# Altium PCB AT89S52单片机入门与提高_粗.PcbDoc (part 3 of 5)
Units mm, origin at the board's own origin, x right, y up, seen from the top; angles counter-clockwise.
Board outline 152.4 x 101.6 mm, 2 copper layers (Top Layer, Bottom Layer); 111 components, 112 nets, 451 pads, 42 vias.
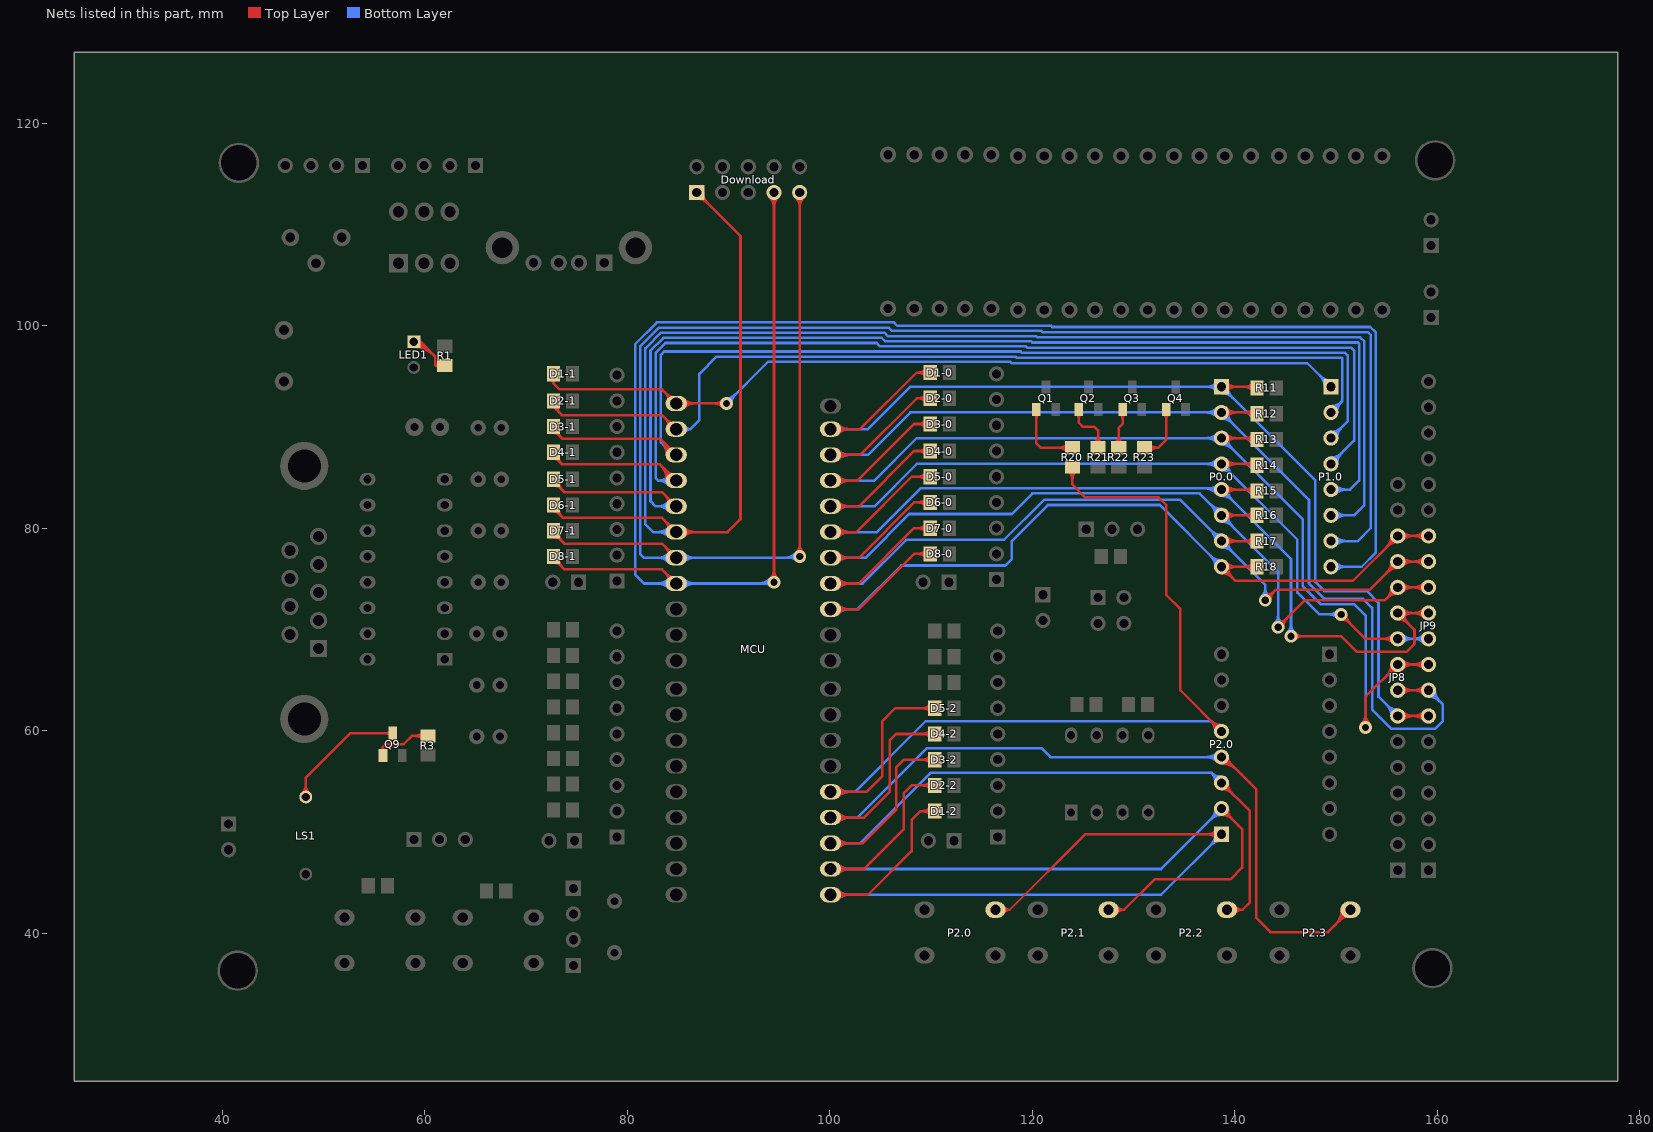
[diagram p3: the nets of this part, all layers, seen from the top]

## Via types
v1: diameter 1.27, hole 0.711, Top Layer to Bottom Layer, 42 vias

## Nets (pads, with @x,y where several pads share a name; then routed paths per layer and width w, separated by ;. In a path a pad name is that pad's centre, name@x,y a point inside that pad or via, vN(x,y) a via of type N, cw(c..) or ccw(c..) an arc to the next point about the centre after c; other vN are vias at no path point) (continued)
NetLED1_1: LED1.1 R1.2 | length 12.2
  Top Layer w0.254: LED1.1@58.928,97.917 cw(c58.928,95.158) 60.879,97.109 ; LED1.1@58.928,98.171 cw(c58.928,96.025) 60.446,97.542 ; LED1.1@58.928,98.679 cw(c58.928,97.759) 59.578,98.41 ; 60.012,97.976 ccw(c58.928,96.892) LED1.1@58.928,98.425 59.563,98.425 61.021,96.967 61.021,96.078 ; R1.2@61.976,96.078 61.021,96.078 ; 61.021,96.078 ccw(c61.021,96.515) 61.41,96.316 cw(c61.021,96.515) 61.021,96.078 ; 61.021,96.078 cw(c61.021,95.641) 61.41,95.84 ccw(c61.021,95.641) 61.021,96.078
NetLS1_1: LS1.1 Q9.3 | length 16.5
  Top Layer w0.254: LS1.1@47.901,53.826 ccw(c47.034,54.693) 48.26,54.693 ccw(c49.486,54.693) LS1.1@48.619,53.826 ; LS1.1@48.26,53.467 48.26,55.372 52.652,59.764 Q9.3@56.835,59.764 ; 56.115,59.764 ccw(c56.115,60.484) 56.624,59.975 cw(c56.115,60.484) 56.115,59.764 ; 56.115,59.764 cw(c56.115,59.045) 56.624,59.553 ccw(c56.115,59.045) 56.115,59.764
NetQ1_1: Q1.1 R20.2 | length 11.3
  Top Layer w0.254: Q1.1@120.401,91.727 120.401,88.387 120.843,87.945 R20.2@123.952,87.945 ; R20.2@123.482,87.575 ccw(c122.589,86.682) 122.589,87.945 ccw(c122.589,89.208) R20.2@123.482,88.315 ; 120.401,90.783 ccw(c119.681,90.783) 120.19,91.291 cw(c119.681,90.783) 120.401,90.783 ; 120.401,90.783 cw(c121.12,90.783) 120.611,91.291 ccw(c121.12,90.783) 120.401,90.783
NetQ2_1: Q2.1 R21.2 | length 9.5
  Top Layer w0.254: Q2.1@124.592,91.727 124.592,90.419 124.968,90.043 126.111,90.043 126.492,89.662 R21.2@126.492,87.945 ; R21.2@126.122,88.315 ccw(c125.229,89.208) 126.492,89.208 ccw(c127.755,89.208) R21.2@126.862,88.315 ; 124.592,90.783 ccw(c123.872,90.783) 124.381,91.291 cw(c123.872,90.783) 124.592,90.783 ; 124.592,90.783 cw(c125.311,90.783) 124.802,91.291 ccw(c125.311,90.783) 124.592,90.783
NetQ3_1: Q3.1 R22.2 | length 8.2
  Top Layer w0.254: R22.2@128.154,88.315 ccw(c127.261,89.208) 128.524,89.208 ccw(c129.787,89.208) R22.2@128.894,88.315 ; R22.2@128.524,87.945 128.524,89.916 128.91,90.302 Q3.1@128.91,91.727 ; 128.91,90.783 ccw(c128.19,90.783) 128.699,91.291 cw(c128.19,90.783) 128.91,90.783 ; 128.91,90.783 cw(c129.629,90.783) 129.12,91.291 ccw(c129.629,90.783) 128.91,90.783
NetQ4_1: Q4.1 R23.2 | length 9.6
  Top Layer w0.254: R23.2@131.064,87.945 132.395,87.945 ; R23.2@131.54,87.582 cw(c132.395,86.758) 132.395,87.945 ; R23.2@131.54,88.308 ccw(c132.395,89.132) 132.395,87.945 ; Q4.1@133.228,91.727 133.228,88.778 132.395,87.945 ; 133.228,90.783 ccw(c132.508,90.783) 133.017,91.291 cw(c132.508,90.783) 133.228,90.783 ; 133.228,90.783 cw(c133.947,90.783) 133.438,91.291 ccw(c133.947,90.783) 133.228,90.783
NetQ9_2: Q9.1 R3.2 | length 9.6
  Top Layer w0.254: Q9.1@55.885,57.564 55.885,58.425 ; R3.2@59.855,59.127 ccw(c58.962,58.234) 58.962,59.497 ccw(c58.962,60.76) R3.2@59.855,59.867 ; R3.2@60.325,59.497 58.735,59.497 57.912,58.674 56.134,58.674 55.885,58.425 ; 55.885,58.425 ccw(c56.414,58.425) 56.075,58.018 cw(c56.414,58.425) 55.885,58.425 ; 55.885,58.425 cw(c55.356,58.425) 55.694,58.018 ccw(c55.356,58.425) 55.885,58.425
P0.0: D1-0.2 JP8.7 JP9.7 MCU.39 P0.0.1 R11.1 | length 151
  Top Layer w0.254: MCU.39@100.072,89.788 102.996,89.788 108.585,95.377 D1-0.2@109.921,95.377 ; MCU.39@100.635,89.525 cw(c101.269,88.891) 101.269,89.788 cw(c101.269,90.685) MCU.39@100.635,90.051 ; MCU.39@100.814,89.346 cw(c101.882,88.278) 101.882,89.788 cw(c101.882,91.298) MCU.39@100.814,90.23 ; D1-0.2@109.551,95.007 ccw(c108.658,94.114) 108.658,95.377 ccw(c108.658,96.64) D1-0.2@109.551,95.747 ; P0.0.1@138.684,93.98 142.052,93.98 R11.1@142.179,93.853 ; P0.0.1@138.945,93.719 cw(c139.575,93.089) 139.575,93.98 cw(c139.575,94.871) P0.0.1@138.945,94.241 ; P0.0.1@139.125,93.539 cw(c140.188,92.476) 140.188,93.98 cw(c140.188,95.484) P0.0.1@139.125,94.421 ; 140.851,93.98 cw(c140.851,92.625) R11.1@141.809,93.583 ; 140.982,93.98 ccw(c140.982,95.15) R11.1@141.809,94.323 ; 141.464,93.98 cw(c141.464,93.238) R11.1@141.989,93.763 ; JP8.7@156.083,61.468 JP9.7@159.131,61.468 ; JP8.7@156.344,61.207 cw(c156.974,60.577) 156.974,61.468 cw(c156.974,62.359) JP8.7@156.344,61.729 ; JP8.7@156.524,61.027 cw(c157.587,59.964) 157.587,61.468 cw(c157.587,62.972) JP8.7@156.524,61.909 ; JP9.7@158.69,61.027 ccw(c157.627,59.964) 157.627,61.468 ccw(c157.627,62.972) JP9.7@158.69,61.909 ; JP9.7@158.87,61.207 ccw(c158.24,60.577) 158.24,61.468 ccw(c158.24,62.359) JP9.7@158.87,61.729
  Bottom Layer w0.254: MCU.39@100.072,89.788 103.758,89.788 107.95,93.98 P0.0.1@138.684,93.98 147.955,84.709 147.955,74.676 148.844,73.787 153.035,73.787 154.178,72.644 154.178,63.373 JP8.7@156.083,61.468 ; 101.269,89.788 ccw(c101.269,88.891) 100.635,89.525 cw(c101.269,88.891) 101.269,89.788 ; 101.269,89.788 cw(c101.269,90.685) 100.635,90.051 ccw(c101.269,90.685) 101.269,89.788 ; 101.882,89.788 ccw(c101.882,88.278) 100.814,89.346 cw(c101.882,88.278) 101.882,89.788 ; 101.882,89.788 cw(c101.882,91.298) 100.814,90.23 ccw(c101.882,91.298) 101.882,89.788 ; 137.18,93.98 ccw(c137.18,95.484) 138.243,94.421 cw(c137.18,95.484) 137.18,93.98 ; 137.18,93.98 cw(c137.18,92.476) 138.243,93.539 ccw(c137.18,92.476) 137.18,93.98 ; 137.793,93.98 ccw(c137.793,94.871) 138.423,94.241 cw(c137.793,94.871) 137.793,93.98 ; 137.793,93.98 cw(c137.793,93.089) 138.423,93.719 ccw(c137.793,93.089) 137.793,93.98 ; P0.0.1@139.314,93.35 ccw(c138.684,92.72) 138.684,93.611 cw(c138.684,92.72) P0.0.1@139.314,93.35 ; P0.0.1@139.314,93.35 cw(c139.944,93.98) 139.053,93.98 ccw(c139.944,93.98) P0.0.1@139.314,93.35 ; 139.748,92.916 ccw(c138.684,91.853) 138.684,93.357 cw(c138.684,91.853) 139.748,92.916 ; 139.748,92.916 cw(c140.811,93.98) 139.307,93.98 ccw(c140.811,93.98) 139.748,92.916 ; 155.019,62.532 ccw(c156.083,63.595) 156.083,62.091 cw(c156.083,63.595) 155.019,62.532 ; 155.019,62.532 cw(c153.956,61.468) 155.46,61.468 ccw(c153.956,61.468) 155.019,62.532 ; 155.453,62.098 ccw(c156.083,62.728) 156.083,61.837 cw(c156.083,62.728) 155.453,62.098 ; 155.453,62.098 cw(c154.823,61.468) 155.714,61.468 ccw(c154.823,61.468) 155.453,62.098
P0.1: D2-0.2 JP8.8 JP9.8 MCU.38 P0.0.2 R12.1 | length 158.3
  Top Layer w0.254: MCU.38@100.072,87.248 102.996,87.248 108.585,92.837 D2-0.2@109.921,92.837 ; MCU.38@100.635,86.985 cw(c101.269,86.351) 101.269,87.248 cw(c101.269,88.145) MCU.38@100.635,87.511 ; MCU.38@100.814,86.806 cw(c101.882,85.738) 101.882,87.248 cw(c101.882,88.758) MCU.38@100.814,87.69 ; D2-0.2@109.551,92.467 ccw(c108.658,91.574) 108.658,92.837 ccw(c108.658,94.1) D2-0.2@109.551,93.207 ; P0.0.2@138.684,91.44 142.052,91.44 R12.1@142.179,91.313 ; P0.0.2@138.945,91.179 cw(c139.575,90.549) 139.575,91.44 cw(c139.575,92.331) P0.0.2@138.945,91.701 ; P0.0.2@139.125,90.999 cw(c140.188,89.936) 140.188,91.44 cw(c140.188,92.944) P0.0.2@139.125,91.881 ; 140.851,91.44 cw(c140.851,90.085) R12.1@141.809,91.043 ; 140.982,91.44 ccw(c140.982,92.61) R12.1@141.809,91.783 ; 141.464,91.44 cw(c141.464,90.698) R12.1@141.989,91.223 ; JP8.8@156.083,64.008 JP9.8@159.131,64.008 ; JP8.8@156.344,63.747 cw(c156.974,63.117) 156.974,64.008 cw(c156.974,64.899) JP8.8@156.344,64.269 ; JP8.8@156.524,63.567 cw(c157.587,62.504) 157.587,64.008 cw(c157.587,65.512) JP8.8@156.524,64.449 ; JP9.8@158.69,63.567 ccw(c157.627,62.504) 157.627,64.008 ccw(c157.627,65.512) JP9.8@158.69,64.449 ; JP9.8@158.87,63.747 ccw(c158.24,63.117) 158.24,64.008 ccw(c158.24,64.899) JP9.8@158.87,64.269
  Bottom Layer w0.254: MCU.38@100.072,87.248 103.758,87.248 107.95,91.44 P0.0.2@138.684,91.44 147.32,82.804 147.32,74.549 148.844,73.025 152.654,73.025 153.543,72.136 153.543,62.103 155.448,60.198 159.766,60.198 160.528,60.96 160.528,62.611 JP9.8@159.131,64.008 ; 101.269,87.248 ccw(c101.269,86.351) 100.635,86.985 cw(c101.269,86.351) 101.269,87.248 ; 101.269,87.248 cw(c101.269,88.145) 100.635,87.511 ccw(c101.269,88.145) 101.269,87.248 ; 101.882,87.248 ccw(c101.882,85.738) 100.814,86.806 cw(c101.882,85.738) 101.882,87.248 ; 101.882,87.248 cw(c101.882,88.758) 100.814,87.69 ccw(c101.882,88.758) 101.882,87.248 ; 137.18,91.44 ccw(c137.18,92.944) 138.243,91.881 cw(c137.18,92.944) 137.18,91.44 ; 137.18,91.44 cw(c137.18,89.936) 138.243,90.999 ccw(c137.18,89.936) 137.18,91.44 ; 137.793,91.44 ccw(c137.793,92.331) 138.423,91.701 cw(c137.793,92.331) 137.793,91.44 ; 137.793,91.44 cw(c137.793,90.549) 138.423,91.179 ccw(c137.793,90.549) 137.793,91.44 ; 139.314,90.81 ccw(c138.684,90.18) 138.684,91.071 cw(c138.684,90.18) 139.314,90.81 ; 139.314,90.81 cw(c139.944,91.44) 139.053,91.44 ccw(c139.944,91.44) 139.314,90.81 ; 139.748,90.376 ccw(c138.684,89.313) 138.684,90.817 cw(c138.684,89.313) 139.748,90.376 ; 139.748,90.376 cw(c140.811,91.44) 139.307,91.44 ccw(c140.811,91.44) 139.748,90.376 ; 159.761,63.378 ccw(c159.131,62.748) 159.131,63.639 cw(c159.131,62.748) 159.761,63.378 ; 159.761,63.378 cw(c160.391,64.008) 159.5,64.008 ccw(c160.391,64.008) 159.761,63.378 ; 160.195,62.944 ccw(c159.131,61.881) 159.131,63.385 cw(c159.131,61.881) 160.195,62.944 ; 160.195,62.944 cw(c161.258,64.008) 159.754,64.008 ccw(c161.258,64.008) 160.195,62.944
P0.2: D3-0.2 JP8.9 JP9.9 MCU.37 P0.0.3 R13.1 | length 154.8
  Top Layer w0.254: MCU.37@100.072,84.708 102.742,84.708 108.331,90.297 D3-0.2@109.921,90.297 ; MCU.37@100.635,84.445 cw(c101.269,83.811) 101.269,84.708 cw(c101.269,85.605) MCU.37@100.635,84.971 ; MCU.37@100.814,84.266 cw(c101.882,83.198) 101.882,84.708 cw(c101.882,86.218) MCU.37@100.814,85.15 ; D3-0.2@109.551,89.927 ccw(c108.658,89.034) 108.658,90.297 ccw(c108.658,91.56) D3-0.2@109.551,90.667 ; P0.0.3@138.684,88.9 142.052,88.9 R13.1@142.179,88.773 ; P0.0.3@138.945,88.639 cw(c139.575,88.009) 139.575,88.9 cw(c139.575,89.791) P0.0.3@138.945,89.161 ; P0.0.3@139.125,88.459 cw(c140.188,87.396) 140.188,88.9 cw(c140.188,90.404) P0.0.3@139.125,89.341 ; 140.851,88.9 cw(c140.851,87.545) R13.1@141.809,88.503 ; 140.982,88.9 ccw(c140.982,90.07) R13.1@141.809,89.243 ; 141.464,88.9 cw(c141.464,88.158) R13.1@141.989,88.683 ; v1@152.549,60.684 ccw(c151.682,61.551) 152.908,61.551 ccw(c154.134,61.551) v1@153.267,60.684 ; v1(152.908,60.325) 152.908,63.373 JP8.9@156.083,66.548 JP9.9@159.131,66.548 ; JP8.9@155.46,66.548 cw(c153.956,66.548) 155.019,65.484 cw(c156.083,64.421) JP8.9@156.083,65.925 ; JP8.9@155.714,66.548 cw(c154.823,66.548) 155.453,65.918 cw(c156.083,65.288) JP8.9@156.083,66.179 ; JP8.9@156.344,66.287 cw(c156.974,65.657) 156.974,66.548 cw(c156.974,67.439) JP8.9@156.344,66.809 ; JP8.9@156.524,66.107 cw(c157.587,65.044) 157.587,66.548 cw(c157.587,68.052) JP8.9@156.524,66.989 ; JP9.9@158.69,66.107 ccw(c157.627,65.044) 157.627,66.548 ccw(c157.627,68.052) JP9.9@158.69,66.989 ; JP9.9@158.87,66.287 ccw(c158.24,65.657) 158.24,66.548 ccw(c158.24,67.439) JP9.9@158.87,66.809
  Bottom Layer w0.254: MCU.37@100.072,84.708 104.393,84.708 108.585,88.9 P0.0.3@138.684,88.9 146.685,80.899 146.685,74.295 148.463,72.517 151.765,72.517 152.908,71.374 v1(152.908,60.325) ; 101.269,84.708 ccw(c101.269,83.811) 100.635,84.445 cw(c101.269,83.811) 101.269,84.708 ; 101.269,84.708 cw(c101.269,85.605) 100.635,84.971 ccw(c101.269,85.605) 101.269,84.708 ; 101.882,84.708 ccw(c101.882,83.198) 100.814,84.266 cw(c101.882,83.198) 101.882,84.708 ; 101.882,84.708 cw(c101.882,86.218) 100.814,85.15 ccw(c101.882,86.218) 101.882,84.708 ; 137.18,88.9 ccw(c137.18,90.404) 138.243,89.341 cw(c137.18,90.404) 137.18,88.9 ; 137.18,88.9 cw(c137.18,87.396) 138.243,88.459 ccw(c137.18,87.396) 137.18,88.9 ; 137.793,88.9 ccw(c137.793,89.791) 138.423,89.161 cw(c137.793,89.791) 137.793,88.9 ; 137.793,88.9 cw(c137.793,88.009) 138.423,88.639 ccw(c137.793,88.009) 137.793,88.9 ; 139.314,88.27 ccw(c138.684,87.64) 138.684,88.531 cw(c138.684,87.64) 139.314,88.27 ; 139.314,88.27 cw(c139.944,88.9) 139.053,88.9 ccw(c139.944,88.9) 139.314,88.27 ; 139.748,87.836 ccw(c138.684,86.773) 138.684,88.277 cw(c138.684,86.773) 139.748,87.836 ; 139.748,87.836 cw(c140.811,88.9) 139.307,88.9 ccw(c140.811,88.9) 139.748,87.836 ; 152.908,61.551 ccw(c154.134,61.551) 153.267,60.684 cw(c154.134,61.551) 152.908,61.551 ; 152.908,61.551 cw(c151.682,61.551) 152.549,60.684 ccw(c151.682,61.551) 152.908,61.551
P0.3: D4-0.2 JP8.10 JP9.10 MCU.36 P0.0.4 R14.1 | length 145.9
  Top Layer w0.254: MCU.36@100.072,82.168 102.869,82.168 108.331,87.63 D4-0.2@109.921,87.63 ; MCU.36@100.635,81.905 cw(c101.269,81.271) 101.269,82.168 cw(c101.269,83.065) MCU.36@100.635,82.431 ; MCU.36@100.814,81.726 cw(c101.882,80.658) 101.882,82.168 cw(c101.882,83.678) MCU.36@100.814,82.61 ; D4-0.2@109.551,87.26 ccw(c108.658,86.367) 108.658,87.63 ccw(c108.658,88.893) D4-0.2@109.551,88 ; P0.0.4@138.684,86.36 142.052,86.36 R14.1@142.179,86.233 ; P0.0.4@138.945,86.099 cw(c139.575,85.469) 139.575,86.36 cw(c139.575,87.251) P0.0.4@138.945,86.621 ; P0.0.4@139.125,85.919 cw(c140.188,84.856) 140.188,86.36 cw(c140.188,87.864) P0.0.4@139.125,86.801 ; 140.851,86.36 cw(c140.851,85.005) R14.1@141.809,85.963 ; 140.982,86.36 ccw(c140.982,87.53) R14.1@141.809,86.703 ; 141.464,86.36 cw(c141.464,85.618) R14.1@141.989,86.143 ; v1@150.495,70.993 cw(c150.495,69.767) 151.362,70.634 cw(c152.229,71.501) v1@151.003,71.501 ; v1(150.495,71.501) 152.908,69.088 JP8.10@156.083,69.088 ; JP8.10@155.642,68.647 ccw(c154.579,67.584) 154.579,69.088 ccw(c154.579,70.592) JP8.10@155.642,69.529 ; JP8.10@155.822,68.827 ccw(c155.192,68.197) 155.192,69.088 ccw(c155.192,69.979) JP8.10@155.822,69.349
  Bottom Layer w0.254: MCU.36@100.072,82.168 104.393,82.168 108.585,86.36 P0.0.4@138.684,86.36 146.177,78.867 146.177,73.66 148.336,71.501 v1(150.495,71.501) ; JP8.10@156.083,69.088 JP9.10@159.131,69.088 ; 101.269,82.168 ccw(c101.269,81.271) 100.635,81.905 cw(c101.269,81.271) 101.269,82.168 ; 101.269,82.168 cw(c101.269,83.065) 100.635,82.431 ccw(c101.269,83.065) 101.269,82.168 ; 101.882,82.168 ccw(c101.882,80.658) 100.814,81.726 cw(c101.882,80.658) 101.882,82.168 ; 101.882,82.168 cw(c101.882,83.678) 100.814,82.61 ccw(c101.882,83.678) 101.882,82.168 ; 137.18,86.36 ccw(c137.18,87.864) 138.243,86.801 cw(c137.18,87.864) 137.18,86.36 ; 137.18,86.36 cw(c137.18,84.856) 138.243,85.919 ccw(c137.18,84.856) 137.18,86.36 ; 137.793,86.36 ccw(c137.793,87.251) 138.423,86.621 cw(c137.793,87.251) 137.793,86.36 ; 137.793,86.36 cw(c137.793,85.469) 138.423,86.099 ccw(c137.793,85.469) 137.793,86.36 ; 139.314,85.73 ccw(c138.684,85.1) 138.684,85.991 cw(c138.684,85.1) 139.314,85.73 ; 139.314,85.73 cw(c139.944,86.36) 139.053,86.36 ccw(c139.944,86.36) 139.314,85.73 ; 139.748,85.296 ccw(c138.684,84.233) 138.684,85.737 cw(c138.684,84.233) 139.748,85.296 ; 139.748,85.296 cw(c140.811,86.36) 139.307,86.36 ccw(c140.811,86.36) 139.748,85.296 ; 149.269,71.501 ccw(c149.269,72.727) 150.136,71.86 cw(c149.269,72.727) 149.269,71.501 ; 149.269,71.501 cw(c149.269,70.275) 150.136,71.142 ccw(c149.269,70.275) 149.269,71.501 ; 156.974,69.088 ccw(c156.974,68.197) 156.344,68.827 cw(c156.974,68.197) 156.974,69.088 ; 156.974,69.088 cw(c156.974,69.979) 156.344,69.349 ccw(c156.974,69.979) 156.974,69.088 ; 157.587,69.088 ccw(c157.587,67.584) 156.524,68.647 cw(c157.587,67.584) 157.587,69.088 ; 157.587,69.088 cw(c157.587,70.592) 156.524,69.529 ccw(c157.587,70.592) 157.587,69.088 ; 157.627,69.088 ccw(c157.627,70.592) 158.69,69.529 cw(c157.627,70.592) 157.627,69.088 ; 157.627,69.088 cw(c157.627,67.584) 158.69,68.647 ccw(c157.627,67.584) 157.627,69.088 ; 158.24,69.088 ccw(c158.24,69.979) 158.87,69.349 cw(c158.24,69.979) 158.24,69.088 ; 158.24,69.088 cw(c158.24,68.197) 158.87,68.827 ccw(c158.24,68.197) 158.24,69.088
P0.4: D5-0.2 JP8.11 JP9.11 MCU.35 P0.0.5 R15.1 | length 144.4
  Top Layer w0.254: MCU.35@100.072,79.628 102.615,79.628 108.077,85.09 D5-0.2@109.921,85.09 ; MCU.35@100.635,79.365 cw(c101.269,78.731) 101.269,79.628 cw(c101.269,80.525) MCU.35@100.635,79.891 ; MCU.35@100.814,79.186 cw(c101.882,78.118) 101.882,79.628 cw(c101.882,81.138) MCU.35@100.814,80.07 ; D5-0.2@109.551,84.72 ccw(c108.658,83.827) 108.658,85.09 ccw(c108.658,86.353) D5-0.2@109.551,85.46 ; P0.0.5@138.684,83.82 142.052,83.82 R15.1@142.179,83.693 ; P0.0.5@138.945,83.559 cw(c139.575,82.929) 139.575,83.82 cw(c139.575,84.711) P0.0.5@138.945,84.081 ; P0.0.5@139.125,83.379 cw(c140.188,82.316) 140.188,83.82 cw(c140.188,85.324) P0.0.5@139.125,84.261 ; 140.851,83.82 cw(c140.851,82.465) R15.1@141.809,83.423 ; 140.982,83.82 ccw(c140.982,84.99) R15.1@141.809,84.163 ; 141.464,83.82 cw(c141.464,83.078) R15.1@141.989,83.603 ; v1(145.542,69.342) 150.495,69.342 152.019,67.818 156.972,67.818 157.734,68.58 157.734,69.977 JP8.11@156.083,71.628 JP9.11@159.131,71.628 ; v1@145.901,68.983 cw(c146.768,68.116) 146.768,69.342 cw(c146.768,70.568) v1@145.901,69.701 ; JP8.11@156.083,71.005 cw(c156.083,69.501) 157.147,70.564 cw(c158.21,71.628) JP8.11@156.706,71.628 ; JP8.11@156.083,71.259 cw(c156.083,70.368) 156.713,70.998 cw(c157.343,71.628) JP8.11@156.452,71.628 ; JP8.11@156.344,71.367 cw(c156.974,70.737) 156.974,71.628 cw(c156.974,72.519) JP8.11@156.344,71.889 ; JP8.11@156.524,71.187 cw(c157.587,70.124) 157.587,71.628 cw(c157.587,73.132) JP8.11@156.524,72.069 ; JP9.11@158.69,71.187 ccw(c157.627,70.124) 157.627,71.628 ccw(c157.627,73.132) JP9.11@158.69,72.069 ; JP9.11@158.87,71.367 ccw(c158.24,70.737) 158.24,71.628 ccw(c158.24,72.519) JP9.11@158.87,71.889
  Bottom Layer w0.254: MCU.35@100.072,79.628 104.647,79.628 108.966,83.947 138.557,83.947 P0.0.5@138.684,83.82 145.542,76.962 v1(145.542,69.342) ; 101.269,79.628 ccw(c101.269,78.731) 100.635,79.365 cw(c101.269,78.731) 101.269,79.628 ; 101.269,79.628 cw(c101.269,80.525) 100.635,79.891 ccw(c101.269,80.525) 101.269,79.628 ; 101.882,79.628 ccw(c101.882,78.118) 100.814,79.186 cw(c101.882,78.118) 101.882,79.628 ; 101.882,79.628 cw(c101.882,81.138) 100.814,80.07 ccw(c101.882,81.138) 101.882,79.628 ; 137.487,83.947 ccw(c137.487,85.017) 138.243,84.261 cw(c137.487,85.017) 137.487,83.947 ; 137.487,83.947 cw(c137.487,82.623) 138.423,83.559 ccw(c137.487,82.623) 137.487,83.947 ; 139.314,83.19 ccw(c138.684,82.56) 138.684,83.451 cw(c138.684,82.56) 139.314,83.19 ; 139.314,83.19 cw(c139.944,83.82) 139.053,83.82 ccw(c139.944,83.82) 139.314,83.19 ; 139.748,82.756 ccw(c138.684,81.693) 138.684,83.197 cw(c138.684,81.693) 139.748,82.756 ; 139.748,82.756 cw(c140.811,83.82) 139.307,83.82 ccw(c140.811,83.82) 139.748,82.756 ; 145.542,70.568 ccw(c146.768,70.568) 145.901,69.701 cw(c146.768,70.568) 145.542,70.568 ; 145.542,70.568 cw(c144.316,70.568) 145.183,69.701 ccw(c144.316,70.568) 145.542,70.568 ; 136.873,83.947 cw(c136.873,82.009) 138.243,83.379 ccw(c136.873,82.009) 136.873,83.947
P0.5: D6-0.2 JP8.12 JP9.12 MCU.34 P0.0.6 R16.1 | length 138.8
  Top Layer w0.254: MCU.34@100.072,77.088 102.869,77.088 108.331,82.55 D6-0.2@109.921,82.55 ; MCU.34@100.635,76.825 cw(c101.269,76.191) 101.269,77.088 cw(c101.269,77.985) MCU.34@100.635,77.351 ; MCU.34@100.814,76.646 cw(c101.882,75.578) 101.882,77.088 cw(c101.882,78.598) MCU.34@100.814,77.53 ; D6-0.2@109.551,82.18 ccw(c108.658,81.287) 108.658,82.55 ccw(c108.658,83.813) D6-0.2@109.551,82.92 ; P0.0.6@138.684,81.28 R16.1@142.179,81.28 ; P0.0.6@138.945,81.019 cw(c139.575,80.389) 139.575,81.28 cw(c139.575,82.171) P0.0.6@138.945,81.541 ; P0.0.6@139.125,80.839 cw(c140.188,79.776) 140.188,81.28 cw(c140.188,82.784) P0.0.6@139.125,81.721 ; R16.1@141.809,80.91 ccw(c140.916,80.017) 140.916,81.28 ccw(c140.916,82.543) R16.1@141.809,81.65 ; v1(144.272,70.231) 146.939,72.898 154.813,72.898 JP8.12@156.083,74.168 JP9.12@159.131,74.168 ; v1@144.272,70.739 ccw(c144.272,71.965) 145.139,71.098 ccw(c146.006,70.231) v1@144.78,70.231 ; JP8.12@155.46,74.168 cw(c153.956,74.168) 155.019,73.104 cw(c156.083,72.041) JP8.12@156.083,73.545 ; JP8.12@155.714,74.168 cw(c154.823,74.168) 155.453,73.538 cw(c156.083,72.908) JP8.12@156.083,73.799 ; JP8.12@156.344,73.907 cw(c156.974,73.277) 156.974,74.168 cw(c156.974,75.059) JP8.12@156.344,74.429 ; JP8.12@156.524,73.727 cw(c157.587,72.664) 157.587,74.168 cw(c157.587,75.672) JP8.12@156.524,74.609 ; JP9.12@158.69,73.727 ccw(c157.627,72.664) 157.627,74.168 ccw(c157.627,75.672) JP9.12@158.69,74.609 ; JP9.12@158.87,73.907 ccw(c158.24,73.277) 158.24,74.168 ccw(c158.24,75.059) JP9.12@158.87,74.429
  Bottom Layer w0.254: MCU.34@100.072,77.088 103.504,77.088 107.823,81.407 117.983,81.407 120.015,83.439 136.525,83.439 P0.0.6@138.684,81.28 144.272,75.692 v1(144.272,70.231) ; 101.269,77.088 ccw(c101.269,76.191) 100.635,76.825 cw(c101.269,76.191) 101.269,77.088 ; 101.269,77.088 cw(c101.269,77.985) 100.635,77.351 ccw(c101.269,77.985) 101.269,77.088 ; 101.882,77.088 ccw(c101.882,75.578) 100.814,76.646 cw(c101.882,75.578) 101.882,77.088 ; 101.882,77.088 cw(c101.882,78.598) 100.814,77.53 ccw(c101.882,78.598) 101.882,77.088 ; 137.62,82.344 ccw(c138.684,83.407) 138.684,81.903 cw(c138.684,83.407) 137.62,82.344 ; 137.62,82.344 cw(c136.557,81.28) 138.061,81.28 ccw(c136.557,81.28) 137.62,82.344 ; 138.054,81.91 ccw(c138.684,82.54) 138.684,81.649 cw(c138.684,82.54) 138.054,81.91 ; 138.054,81.91 cw(c137.424,81.28) 138.315,81.28 ccw(c137.424,81.28) 138.054,81.91 ; 139.314,80.65 ccw(c138.684,80.02) 138.684,80.911 cw(c138.684,80.02) 139.314,80.65 ; 139.314,80.65 cw(c139.944,81.28) 139.053,81.28 ccw(c139.944,81.28) 139.314,80.65 ; 139.748,80.216 ccw(c138.684,79.153) 138.684,80.657 cw(c138.684,79.153) 139.748,80.216 ; 139.748,80.216 cw(c140.811,81.28) 139.307,81.28 ccw(c140.811,81.28) 139.748,80.216 ; 144.272,71.457 ccw(c145.498,71.457) 144.631,70.59 cw(c145.498,71.457) 144.272,71.457 ; 144.272,71.457 cw(c143.046,71.457) 143.913,70.59 ccw(c143.046,71.457) 144.272,71.457
P0.6: D7-0.2 JP8.13 JP9.13 MCU.33 P0.0.7 R17.1 | length 135.8
  Top Layer w0.254: MCU.33@100.072,74.548 102.869,74.548 108.331,80.01 D7-0.2@109.921,80.01 ; MCU.33@100.635,74.285 cw(c101.269,73.651) 101.269,74.548 cw(c101.269,75.445) MCU.33@100.635,74.811 ; MCU.33@100.814,74.106 cw(c101.882,73.038) 101.882,74.548 cw(c101.882,76.058) MCU.33@100.814,74.99 ; D7-0.2@109.551,79.64 ccw(c108.658,78.747) 108.658,80.01 ccw(c108.658,81.273) D7-0.2@109.551,80.38 ; P0.0.7@138.684,78.74 R17.1@142.179,78.74 ; P0.0.7@138.945,78.479 cw(c139.575,77.849) 139.575,78.74 cw(c139.575,79.631) P0.0.7@138.945,79.001 ; P0.0.7@139.125,78.299 cw(c140.188,77.236) 140.188,78.74 cw(c140.188,80.244) P0.0.7@139.125,79.181 ; R17.1@141.809,78.37 ccw(c140.916,77.477) 140.916,78.74 ccw(c140.916,80.003) R17.1@141.809,79.11 ; v1(143.002,72.898) 144.018,73.914 153.289,73.914 JP8.13@156.083,76.708 JP9.13@159.131,76.708 ; v1@143.002,73.406 ccw(c143.002,74.632) 143.869,73.765 ccw(c144.736,72.898) v1@143.51,72.898 ; JP8.13@155.46,76.708 cw(c153.956,76.708) 155.019,75.644 cw(c156.083,74.581) JP8.13@156.083,76.085 ; JP8.13@155.714,76.708 cw(c154.823,76.708) 155.453,76.078 cw(c156.083,75.448) JP8.13@156.083,76.339 ; JP8.13@156.344,76.447 cw(c156.974,75.817) 156.974,76.708 cw(c156.974,77.599) JP8.13@156.344,76.969 ; JP8.13@156.524,76.267 cw(c157.587,75.204) 157.587,76.708 cw(c157.587,78.212) JP8.13@156.524,77.149 ; JP9.13@158.69,76.267 ccw(c157.627,75.204) 157.627,76.708 ccw(c157.627,78.212) JP9.13@158.69,77.149 ; JP9.13@158.87,76.447 ccw(c158.24,75.817) 158.24,76.708 ccw(c158.24,77.599) JP9.13@158.87,76.969
  Bottom Layer w0.254: MCU.33@100.072,74.548 103.25,74.548 107.569,78.867 117.221,78.867 121.158,82.804 134.62,82.804 P0.0.7@138.684,78.74 143.002,74.422 v1(143.002,72.898) ; 101.269,74.548 ccw(c101.269,73.651) 100.635,74.285 cw(c101.269,73.651) 101.269,74.548 ; 101.269,74.548 cw(c101.269,75.445) 100.635,74.811 ccw(c101.269,75.445) 101.269,74.548 ; 101.882,74.548 ccw(c101.882,73.038) 100.814,74.106 cw(c101.882,73.038) 101.882,74.548 ; 101.882,74.548 cw(c101.882,76.058) 100.814,74.99 ccw(c101.882,76.058) 101.882,74.548 ; 137.62,79.804 ccw(c138.684,80.867) 138.684,79.363 cw(c138.684,80.867) 137.62,79.804 ; 137.62,79.804 cw(c136.557,78.74) 138.061,78.74 ccw(c136.557,78.74) 137.62,79.804 ; 138.054,79.37 ccw(c138.684,80) 138.684,79.109 cw(c138.684,80) 138.054,79.37 ; 138.054,79.37 cw(c137.424,78.74) 138.315,78.74 ccw(c137.424,78.74) 138.054,79.37 ; 139.314,78.11 ccw(c138.684,77.48) 138.684,78.371 cw(c138.684,77.48) 139.314,78.11 ; 139.314,78.11 cw(c139.944,78.74) 139.053,78.74 ccw(c139.944,78.74) 139.314,78.11 ; 139.748,77.676 ccw(c138.684,76.613) 138.684,78.117 cw(c138.684,76.613) 139.748,77.676 ; 139.748,77.676 cw(c140.811,78.74) 139.307,78.74 ccw(c140.811,78.74) 139.748,77.676 ; 143.002,74.124 ccw(c144.228,74.124) 143.361,73.257 cw(c144.228,74.124) 143.002,74.124 ; 143.002,74.124 cw(c141.776,74.124) 142.643,73.257 ccw(c141.776,74.124) 143.002,74.124
P0.7: D8-0.2 JP8.14 JP9.14 MCU.32 P0.0.8 R18.1 | length 126.6
  Top Layer w0.254: MCU.32@100.072,72.008 102.869,72.008 108.331,77.47 D8-0.2@109.921,77.47 ; MCU.32@100.635,71.745 cw(c101.269,71.111) 101.269,72.008 cw(c101.269,72.905) MCU.32@100.635,72.271 ; MCU.32@100.814,71.566 cw(c101.882,70.498) 101.882,72.008 cw(c101.882,73.518) MCU.32@100.814,72.45 ; D8-0.2@109.551,77.1 ccw(c108.658,76.207) 108.658,77.47 ccw(c108.658,78.733) D8-0.2@109.551,77.84 ; P0.0.8@138.684,75.577 cw(c138.684,74.073) 139.748,75.136 cw(c140.811,76.2) P0.0.8@139.307,76.2 ; P0.0.8@138.684,75.831 cw(c138.684,74.94) 139.314,75.57 cw(c139.944,76.2) P0.0.8@139.053,76.2 ; P0.0.8@138.945,75.939 cw(c139.575,75.309) 139.575,76.2 cw(c139.575,77.091) P0.0.8@138.945,76.461 ; P0.0.8@139.125,75.759 cw(c140.188,74.696) 140.188,76.2 cw(c140.188,77.704) P0.0.8@139.125,76.641 ; R18.1@141.809,75.83 ccw(c140.916,74.937) 140.916,76.2 ccw(c140.916,77.463) R18.1@141.809,76.57 ; R18.1@142.179,76.2 P0.0.8@138.684,76.2 140.081,74.803 151.638,74.803 JP8.14@156.083,79.248 JP9.14@159.131,79.248 ; JP8.14@155.46,79.248 cw(c153.956,79.248) 155.019,78.184 cw(c156.083,77.121) JP8.14@156.083,78.625 ; JP8.14@155.714,79.248 cw(c154.823,79.248) 155.453,78.618 cw(c156.083,77.988) JP8.14@156.083,78.879 ; JP8.14@156.344,78.987 cw(c156.974,78.357) 156.974,79.248 cw(c156.974,80.139) JP8.14@156.344,79.509 ; JP8.14@156.524,78.807 cw(c157.587,77.744) 157.587,79.248 cw(c157.587,80.752) JP8.14@156.524,79.689 ; JP9.14@158.69,78.807 ccw(c157.627,77.744) 157.627,79.248 ccw(c157.627,80.752) JP9.14@158.69,79.689 ; JP9.14@158.87,78.987 ccw(c158.24,78.357) 158.24,79.248 ccw(c158.24,80.139) JP9.14@158.87,79.509
  Bottom Layer w0.254: MCU.32@100.072,72.008 102.742,72.008 107.061,76.327 117.348,76.327 117.983,76.962 117.983,78.74 121.539,82.296 132.588,82.296 P0.0.8@138.684,76.2 ; 101.269,72.008 ccw(c101.269,71.111) 100.635,71.745 cw(c101.269,71.111) 101.269,72.008 ; 101.269,72.008 cw(c101.269,72.905) 100.635,72.271 ccw(c101.269,72.905) 101.269,72.008 ; 101.882,72.008 ccw(c101.882,70.498) 100.814,71.566 cw(c101.882,70.498) 101.882,72.008 ; 101.882,72.008 cw(c101.882,73.518) 100.814,72.45 ccw(c101.882,73.518) 101.882,72.008 ; 137.62,77.264 ccw(c138.684,78.327) 138.684,76.823 cw(c138.684,78.327) 137.62,77.264 ; 137.62,77.264 cw(c136.557,76.2) 138.061,76.2 ccw(c136.557,76.2) 137.62,77.264 ; 138.054,76.83 ccw(c138.684,77.46) 138.684,76.569 cw(c138.684,77.46) 138.054,76.83 ; 138.054,76.83 cw(c137.424,76.2) 138.315,76.2 ccw(c137.424,76.2) 138.054,76.83
P1.0: D1-1.2 MCU.1 P1.0.1 | length 102.8
  Top Layer w0.254: D1-1.2@72.71,95.25 72.71,94.3 ; 83.717,93.444 cw(c82.643,92.37) MCU.1@84.161,92.336 ; 83.977,93.183 ccw(c84.532,93.739) MCU.1@84.532,92.953 ; 84.137,93.023 cw(c83.465,92.352) MCU.1@84.415,92.331 ; MCU.1@85.395,92.065 cw(c86.029,91.431) 86.029,92.328 cw(c86.029,93.225) MCU.1@85.395,92.591 ; MCU.1@85.574,91.886 cw(c86.642,90.818) 86.642,92.328 cw(c86.642,93.838) MCU.1@85.574,92.77 ; v1@89.43,91.969 ccw(c88.563,91.102) 88.563,92.328 ccw(c88.563,93.554) v1@89.43,92.687 ; v1(89.789,92.328) MCU.1@84.832,92.328 83.446,93.714 73.296,93.714 72.71,94.3 ; 72.71,94.3 ccw(c72.281,94.3) 72.474,94.683 cw(c72.281,94.3) 72.71,94.3 ; 72.71,94.3 cw(c73.139,94.3) 72.946,94.683 ccw(c73.139,94.3) 72.71,94.3
  Bottom Layer w0.254: v1(89.789,92.328) 93.904,96.443 117.827,96.443 117.954,96.316 147.143,96.316 P1.0.1@149.479,93.98 ; 90.656,93.195 ccw(c91.523,92.328) 90.297,92.328 cw(c91.523,92.328) 90.656,93.195 ; 90.656,93.195 cw(c89.789,94.062) 89.789,92.836 ccw(c89.789,94.062) 90.656,93.195 ; 148.415,95.044 ccw(c149.479,96.107) 149.479,94.603 cw(c149.479,96.107) 148.415,95.044 ; 148.415,95.044 cw(c147.352,93.98) 148.856,93.98 ccw(c147.352,93.98) 148.415,95.044 ; P1.0.1@148.849,94.61 ccw(c149.479,95.24) 149.479,94.349 cw(c149.479,95.24) P1.0.1@148.849,94.61 ; P1.0.1@148.849,94.61 cw(c148.219,93.98) 149.11,93.98 ccw(c148.219,93.98) P1.0.1@148.849,94.61
P1.1: D2-1.2 MCU.2 P1.0.2 | length 107.1
  Top Layer w0.254: D2-1.2@72.71,92.583 72.71,92.009 73.545,91.174 83.446,91.174 MCU.2@84.832,89.788 ; 83.717,90.904 cw(c82.643,89.83) MCU.2@84.161,89.796 ; 83.977,90.643 ccw(c84.532,91.199) MCU.2@84.532,90.413 ; 84.137,90.483 cw(c83.465,89.812) MCU.2@84.415,89.791 ; D2-1.2@72.95,92.361 ccw(c73.489,92.086) 73.061,91.658 cw(c73.489,92.086) D2-1.2@72.95,92.361 ; D2-1.2@73.176,92.245 ccw(c73.816,91.919) 73.308,91.411 cw(c73.816,91.919) D2-1.2@73.176,92.245
  Bottom Layer w0.254: MCU.2@84.832,89.788 86.232,89.788 ; P1.0.2@149.479,91.44 150.622,92.583 150.622,96.774 150.572,96.824 118.462,96.824 118.335,96.951 88.823,96.951 87.122,95.25 87.122,90.678 86.232,89.788 ; 86.232,89.788 ccw(c86.232,89.134) 85.67,89.468 cw(c86.232,89.134) 86.232,89.788 ; 86.232,89.788 cw(c86.232,90.442) 85.67,90.108 ccw(c86.232,90.442) 86.232,89.788 ; 150.109,92.07 ccw(c150.739,91.44) 149.848,91.44 cw(c150.739,91.44) 150.109,92.07 ; 150.109,92.07 cw(c149.479,92.7) 149.479,91.809 ccw(c149.479,92.7) 150.109,92.07 ; 150.543,92.504 ccw(c151.606,91.44) 150.102,91.44 cw(c151.606,91.44) 150.543,92.504 ; 150.543,92.504 cw(c149.479,93.567) 149.479,92.063 ccw(c149.479,93.567) 150.543,92.504
P1.2: D3-1.2 MCU.3 P1.0.3 | length 122.8
  Top Layer w0.254: D3-1.2@72.71,89.42 cw(c72.71,88.688) 73.227,89.206 ; D3-1.2@72.71,90.043 72.71,89.723 73.579,88.854 83.226,88.854 MCU.3@84.832,87.248 ; D3-1.2@72.972,89.883 ccw(c73.596,89.742) 73.144,89.289 ; D3-1.2@73.22,89.827 ccw(c74.126,89.621) 73.469,88.964 ; 83.252,88.828 cw(c81.673,87.248) MCU.3@83.907,87.248 ; 83.686,88.394 cw(c82.54,87.248) MCU.3@84.161,87.248 ; 83.977,88.103 ccw(c84.532,88.659) MCU.3@84.532,87.873 ; 84.12,87.961 cw(c83.407,87.248) MCU.3@84.415,87.248
  Bottom Layer w0.254: MCU.3@84.832,87.248 84.583,87.248 83.312,88.519 83.312,97.119 83.652,97.459 118.843,97.459 118.97,97.332 150.876,97.332 151.13,97.078 151.13,90.551 P1.0.3@149.479,88.9 ; 150.109,89.53 ccw(c150.739,88.9) 149.848,88.9 cw(c150.739,88.9) 150.109,89.53 ; 150.109,89.53 cw(c149.479,90.16) 149.479,89.269 ccw(c149.479,90.16) 150.109,89.53 ; 150.543,89.964 ccw(c151.606,88.9) 150.102,88.9 cw(c151.606,88.9) 150.543,89.964 ; 150.543,89.964 cw(c149.479,91.027) 149.479,89.523 ccw(c149.479,91.027) 150.543,89.964 ; 83.429,88.402 cw(c82.274,87.248) 83.907,87.248 ccw(c82.274,87.248) 83.429,88.402 ; 83.551,88.28 ccw(c84.532,89.261) 84.532,87.873 cw(c84.532,89.261) 83.551,88.28 ; 83.862,87.969 cw(c83.141,87.248) 84.161,87.248 ccw(c83.141,87.248) 83.862,87.969 ; 83.985,87.846 ccw(c84.532,88.393) 84.532,87.619 cw(c84.532,88.393) 83.985,87.846
P1.3: D4-1.2 MCU.4 P1.0.4 | length 131.2
  Top Layer w0.254: D4-1.2@72.71,86.88 cw(c72.71,86.148) 73.227,86.666 ; D4-1.2@72.71,87.503 72.71,87.183 73.579,86.314 83.226,86.314 MCU.4@84.832,84.708 ; D4-1.2@72.972,87.343 ccw(c73.596,87.202) 73.144,86.749 ; D4-1.2@73.22,87.287 ccw(c74.126,87.081) 73.469,86.424 ; 83.252,86.288 cw(c81.673,84.708) MCU.4@83.907,84.708 ; 83.686,85.854 cw(c82.54,84.708) MCU.4@84.161,84.708 ; 83.977,85.563 ccw(c84.532,86.119) MCU.4@84.532,85.333 ; 84.12,85.421 cw(c83.407,84.708) MCU.4@84.415,84.708
  Bottom Layer w0.254: MCU.4@84.832,84.708 83.059,84.708 ; P1.0.4@149.479,86.36 151.765,88.646 151.765,97.536 151.461,97.84 119.493,97.84 119.366,97.967 104.954,97.967 104.623,98.298 83.773,98.298 82.804,97.329 82.804,84.963 83.059,84.708 ; 83.059,84.708 ccw(c83.059,86.13) 84.082,85.142 cw(c83.059,86.13) 83.059,84.708 ; 83.059,84.708 cw(c83.059,83.286) 84.082,84.274 ccw(c83.059,83.286) 83.059,84.708 ; 83.657,84.708 ccw(c83.657,85.553) 84.265,84.966 cw(c83.657,85.553) 83.657,84.708 ; 83.657,84.708 cw(c83.657,83.863) 84.265,84.45 ccw(c83.657,83.863) 83.657,84.708 ; 150.109,86.99 ccw(c150.739,86.36) 149.848,86.36 cw(c150.739,86.36) 150.109,86.99 ; 150.109,86.99 cw(c149.479,87.62) 149.479,86.729 ccw(c149.479,87.62) 150.109,86.99 ; 150.543,87.424 ccw(c151.606,86.36) 150.102,86.36 cw(c151.606,86.36) 150.543,87.424 ; 150.543,87.424 cw(c149.479,88.487) 149.479,86.983 ccw(c149.479,88.487) 150.543,87.424
P1.4: D5-1.2 MCU.5 P1.0.5 | length 138.7
  Top Layer w0.254: D5-1.2@72.71,84.213 cw(c72.71,83.175) 73.444,83.909 ; D5-1.2@72.71,84.836 72.71,84.643 73.787,83.566 83.434,83.566 MCU.5@84.832,82.168 ; D5-1.2@72.979,84.736 ccw(c73.853,84.736) D5-1.2@73.235,84.118 ; D5-1.2@73.233,84.736 ccw(c74.72,84.736) 73.669,83.684 ; 83.708,83.292 cw(c82.615,82.199) MCU.5@84.161,82.174 ; 83.977,83.023 ccw(c84.532,83.579) MCU.5@84.532,82.793 ; 84.132,82.868 cw(c83.45,82.185) MCU.5@84.415,82.17
  Bottom Layer w0.254: MCU.5@84.832,82.168 82.805,82.168 82.296,82.677 82.296,97.54 83.562,98.806 105.131,98.806 105.462,98.475 119.874,98.475 120.001,98.348 152.14,98.348 152.273,98.215 152.273,84.709 151.384,83.82 P1.0.5@149.479,83.82 ; 83.022,82.168 ccw(c83.022,83.678) 84.09,82.61 cw(c83.022,83.678) 83.022,82.168 ; 83.022,82.168 cw(c83.022,80.658) 84.09,81.726 ccw(c83.022,80.658) 83.022,82.168 ; 83.636,82.168 ccw(c83.636,83.065) 84.27,82.431 cw(c83.636,83.065) 83.636,82.168 ; 83.636,82.168 cw(c83.636,81.271) 84.27,81.905 ccw(c83.636,81.271) 83.636,82.168 ; 150.37,83.82 ccw(c150.37,82.929) 149.74,83.559 cw(c150.37,82.929) 150.37,83.82 ; 150.37,83.82 cw(c150.37,84.711) 149.74,84.081 ccw(c150.37,84.711) 150.37,83.82 ; 150.983,83.82 ccw(c150.983,82.316) 149.92,83.379 cw(c150.983,82.316) 150.983,83.82 ; 150.983,83.82 cw(c150.983,85.324) 149.92,84.261 ccw(c150.983,85.324) 150.983,83.82
P1.5: D6-1.2 Download.1 MCU.6 P1.0.6 | length 194.5
  Top Layer w0.254: D6-1.2@72.71,81.673 cw(c72.71,80.941) 73.227,81.459 ; D6-1.2@72.71,82.296 72.71,81.976 73.66,81.026 83.434,81.026 MCU.6@84.832,79.628 89.915,79.628 91.186,80.899 91.186,108.839 Download.1@86.868,113.157 ; D6-1.2@72.976,82.156 ccw(c73.743,82.04) 73.194,81.492 ; D6-1.2@73.227,82.118 ccw(c74.36,81.947) 73.55,81.136 ; 83.708,80.752 cw(c82.615,79.659) MCU.6@84.161,79.634 ; 83.977,80.483 ccw(c84.532,81.039) MCU.6@84.532,80.253 ; 84.132,80.328 cw(c83.45,79.645) MCU.6@84.415,79.63 ; MCU.6@85.395,79.365 cw(c86.029,78.731) 86.029,79.628 cw(c86.029,80.525) MCU.6@85.395,79.891 ; MCU.6@85.574,79.186 cw(c86.642,78.118) 86.642,79.628 cw(c86.642,81.138) MCU.6@85.574,80.07 ; Download.1@86.868,112.534 cw(c86.868,111.03) 87.932,112.093 cw(c88.995,113.157) Download.1@87.491,113.157 ; Download.1@86.868,112.788 cw(c86.868,111.897) 87.498,112.527 cw(c88.128,113.157) Download.1@87.237,113.157
  Bottom Layer w0.254: MCU.6@84.832,79.628 82.551,79.628 81.788,80.391 81.788,97.75 83.352,99.314 105.385,99.314 105.716,98.983 120.382,98.983 120.509,98.856 152.35,98.856 152.781,98.425 152.781,82.296 151.765,81.28 P1.0.6@149.479,81.28 ; 83.022,79.628 ccw(c83.022,81.138) 84.09,80.07 cw(c83.022,81.138) 83.022,79.628 ; 83.022,79.628 cw(c83.022,78.118) 84.09,79.186 ccw(c83.022,78.118) 83.022,79.628 ; 83.636,79.628 ccw(c83.636,80.525) 84.27,79.891 cw(c83.636,80.525) 83.636,79.628 ; 83.636,79.628 cw(c83.636,78.731) 84.27,79.365 ccw(c83.636,78.731) 83.636,79.628 ; 150.37,81.28 ccw(c150.37,80.389) 149.74,81.019 cw(c150.37,80.389) 150.37,81.28 ; 150.37,81.28 cw(c150.37,82.171) 149.74,81.541 ccw(c150.37,82.171) 150.37,81.28 ; 150.983,81.28 ccw(c150.983,79.776) 149.92,80.839 cw(c150.983,79.776) 150.983,81.28 ; 150.983,81.28 cw(c150.983,82.784) 149.92,81.721 ccw(c150.983,82.784) 150.983,81.28
P1.6: D7-1.2 Download.9 MCU.7 P1.0.7 | length 221.6
  Top Layer w0.254: D7-1.2@72.71,79.133 cw(c72.71,78.095) 73.444,78.829 ; D7-1.2@72.71,79.756 72.71,79.563 73.787,78.486 83.434,78.486 MCU.7@84.832,77.088 ; D7-1.2@72.979,79.656 ccw(c73.853,79.656) D7-1.2@73.235,79.038 ; D7-1.2@73.233,79.656 ccw(c74.72,79.656) 73.669,78.604 ; 83.708,78.212 cw(c82.615,77.119) MCU.7@84.161,77.094 ; 83.977,77.943 ccw(c84.532,78.499) MCU.7@84.532,77.713 ; 84.132,77.788 cw(c83.45,77.105) MCU.7@84.415,77.09 ; Download.9@96.587,112.716 cw(c95.524,111.653) 97.028,111.653 cw(c98.532,111.653) Download.9@97.469,112.716 ; v1@96.669,77.575 ccw(c95.802,78.442) 97.028,78.442 ccw(c98.254,78.442) v1@97.387,77.575 ; Download.9@96.767,112.896 cw(c96.137,112.266) 97.028,112.266 cw(c97.919,112.266) Download.9@97.289,112.896 ; v1(97.028,77.216) Download.9@97.028,113.157
  Bottom Layer w0.254: v1(97.028,77.216) 96.9,77.088 MCU.7@84.832,77.088 81.66,77.088 81.28,77.468 81.28,97.961 83.141,99.822 105.816,99.822 106.147,99.491 120.89,99.491 121.017,99.364 153.156,99.364 153.416,99.104 153.416,80.01 152.146,78.74 P1.0.7@149.479,78.74 ; 83.022,77.088 ccw(c83.022,78.598) 84.09,77.53 cw(c83.022,78.598) 83.022,77.088 ; 83.022,77.088 cw(c83.022,75.578) 84.09,76.646 ccw(c83.022,75.578) 83.022,77.088 ; 83.636,77.088 ccw(c83.636,77.985) 84.27,77.351 cw(c83.636,77.985) 83.636,77.088 ; 83.636,77.088 cw(c83.636,76.191) 84.27,76.825 ccw(c83.636,76.191) 83.636,77.088 ; 86.029,77.088 ccw(c86.029,76.191) 85.395,76.825 cw(c86.029,76.191) 86.029,77.088 ; 86.029,77.088 cw(c86.029,77.985) 85.395,77.351 ccw(c86.029,77.985) 86.029,77.088 ; 86.642,77.088 ccw(c86.642,75.578) 85.574,76.646 cw(c86.642,75.578) 86.642,77.088 ; 86.642,77.088 cw(c86.642,78.598) 85.574,77.53 ccw(c86.642,78.598) 86.642,77.088 ; 150.37,78.74 ccw(c150.37,77.849) 149.74,78.479 cw(c150.37,77.849) 150.37,78.74 ; 150.37,78.74 cw(c150.37,79.631) 149.74,79.001 ccw(c150.37,79.631) 150.37,78.74 ; 150.983,78.74 ccw(c150.983,77.236) 149.92,78.299 cw(c150.983,77.236) 150.983,78.74 ; 150.983,78.74 cw(c150.983,80.244) 149.92,79.181 ccw(c150.983,80.244) 150.983,78.74 ; 95.493,77.088 ccw(c95.493,78.751) 96.669,77.575 cw(c95.493,78.751) 95.493,77.088 ; 96.106,77.088 ccw(c96.106,78.138) 96.848,77.396 cw(c96.106,78.138) 96.106,77.088 ; 96.111,77.088 cw(c96.111,76.299) 96.669,76.857 ccw(c96.111,76.299) 96.111,77.088
P1.7: D8-1.2 Download.7 MCU.8 P1.0.8 | length 229
  Top Layer w0.254: D8-1.2@72.71,76.593 cw(c72.71,75.555) 73.444,76.289 ; D8-1.2@72.71,77.216 72.71,77.023 73.787,75.946 83.434,75.946 MCU.8@84.832,74.548 ; D8-1.2@72.979,77.116 ccw(c73.853,77.116) D8-1.2@73.235,76.498 ; D8-1.2@73.233,77.116 ccw(c74.72,77.116) 73.669,76.064 ; 83.708,75.672 cw(c82.615,74.579) MCU.8@84.161,74.554 ; 83.977,75.403 ccw(c84.532,75.959) MCU.8@84.532,75.173 ; 84.132,75.248 cw(c83.45,74.565) MCU.8@84.415,74.55 ; Download.7@94.047,112.716 cw(c92.984,111.653) 94.488,111.653 cw(c95.992,111.653) Download.7@94.929,112.716 ; v1@94.129,75.035 ccw(c93.262,75.902) 94.488,75.902 ccw(c95.714,75.902) v1@94.847,75.035 ; Download.7@94.227,112.896 cw(c93.597,112.266) 94.488,112.266 cw(c95.379,112.266) Download.7@94.749,112.896 ; v1(94.488,74.676) Download.7@94.488,113.157
  Bottom Layer w0.254: v1(94.488,74.676) 94.36,74.548 MCU.8@84.832,74.548 81.662,74.548 80.772,75.438 80.772,98.171 82.931,100.33 106.324,100.33 106.655,99.999 121.855,99.999 121.982,99.872 153.366,99.872 153.924,99.314 153.924,77.597 152.527,76.2 P1.0.8@149.479,76.2 ; 83.022,74.548 ccw(c83.022,76.058) 84.09,74.99 cw(c83.022,76.058) 83.022,74.548 ; 83.022,74.548 cw(c83.022,73.038) 84.09,74.106 ccw(c83.022,73.038) 83.022,74.548 ; 83.636,74.548 ccw(c83.636,75.445) 84.27,74.811 cw(c83.636,75.445) 83.636,74.548 ; 83.636,74.548 cw(c83.636,73.651) 84.27,74.285 ccw(c83.636,73.651) 83.636,74.548 ; 86.029,74.548 ccw(c86.029,73.651) 85.395,74.285 cw(c86.029,73.651) 86.029,74.548 ; 86.029,74.548 cw(c86.029,75.445) 85.395,74.811 ccw(c86.029,75.445) 86.029,74.548 ; 86.642,74.548 ccw(c86.642,73.038) 85.574,74.106 cw(c86.642,73.038) 86.642,74.548 ; 86.642,74.548 cw(c86.642,76.058) 85.574,74.99 ccw(c86.642,76.058) 86.642,74.548 ; 150.37,76.2 ccw(c150.37,75.309) 149.74,75.939 cw(c150.37,75.309) 150.37,76.2 ; 150.37,76.2 cw(c150.37,77.091) 149.74,76.461 ccw(c150.37,77.091) 150.37,76.2 ; 150.983,76.2 ccw(c150.983,74.696) 149.92,75.759 cw(c150.983,74.696) 150.983,76.2 ; 150.983,76.2 cw(c150.983,77.704) 149.92,76.641 ccw(c150.983,77.704) 150.983,76.2 ; 92.953,74.548 ccw(c92.953,76.211) 94.129,75.035 cw(c92.953,76.211) 92.953,74.548 ; 93.566,74.548 ccw(c93.566,75.598) 94.308,74.856 cw(c93.566,75.598) 93.566,74.548 ; 93.571,74.548 cw(c93.571,73.759) 94.129,74.317 ccw(c93.571,73.759) 93.571,74.548
P2.0: D1-2.2 MCU.21 P2.0.1@138.684,49.784 P2.0.2@116.355,42.331 | length 108.1
  Top Layer w0.254: MCU.21@100.076,43.815 103.759,43.815 108.077,48.133 108.077,51.181 108.966,52.07 D1-2.2@110.368,52.07 ; MCU.21@100.639,43.552 cw(c101.273,42.918) 101.273,43.815 cw(c101.273,44.712) MCU.21@100.639,44.078 ; MCU.21@100.818,43.373 cw(c101.886,42.305) 101.886,43.815 cw(c101.886,45.325) MCU.21@100.818,44.257 ; D1-2.2@109.998,51.7 ccw(c109.105,50.807) 109.105,52.07 ccw(c109.105,53.333) D1-2.2@109.998,52.44 ; P2.0.2@116.355,42.331 117.769,42.331 ; P2.0.2@117.126,41.975 cw(c117.769,41.573) 117.769,42.331 ; P2.0.2@117.126,42.688 ccw(c117.769,43.09) 117.769,42.331 ; P2.0.1@138.243,49.343 ccw(c137.18,48.28) 137.18,49.784 ccw(c137.18,51.288) P2.0.1@138.243,50.225 ; P2.0.1@138.423,49.523 ccw(c137.793,48.893) 137.793,49.784 ccw(c137.793,50.675) P2.0.1@138.423,50.045 ; P2.0.1@138.684,49.784 125.222,49.784 117.769,42.331
  Bottom Layer w0.254: MCU.21@100.076,43.815 132.715,43.815 P2.0.1@138.684,49.784 ; 101.273,43.815 ccw(c101.273,42.918) 100.639,43.552 cw(c101.273,42.918) 101.273,43.815 ; 101.273,43.815 cw(c101.273,44.712) 100.639,44.078 ccw(c101.273,44.712) 101.273,43.815 ; 101.886,43.815 ccw(c101.886,42.305) 100.818,43.373 cw(c101.886,42.305) 101.886,43.815 ; 101.886,43.815 cw(c101.886,45.325) 100.818,44.257 ccw(c101.886,45.325) 101.886,43.815 ; 137.62,48.72 ccw(c136.557,49.784) 138.061,49.784 cw(c136.557,49.784) 137.62,48.72 ; 137.62,48.72 cw(c138.684,47.657) 138.684,49.161 ccw(c138.684,47.657) 137.62,48.72 ; P2.0.1@138.054,49.154 ccw(c137.424,49.784) 138.315,49.784 cw(c137.424,49.784) P2.0.1@138.054,49.154 ; P2.0.1@138.054,49.154 cw(c138.684,48.524) 138.684,49.415 ccw(c138.684,48.524) P2.0.1@138.054,49.154
P2.1: D2-2.2 MCU.22 P2.0.2@138.684,52.324 P2.1.2 | length 106.1
  Top Layer w0.254: MCU.22@100.076,46.355 103.378,46.355 107.315,50.292 107.315,53.848 108.077,54.61 D2-2.2@110.368,54.61 ; MCU.22@100.639,46.092 cw(c101.273,45.458) 101.273,46.355 cw(c101.273,47.252) MCU.22@100.639,46.618 ; MCU.22@100.818,45.913 cw(c101.886,44.845) 101.886,46.355 cw(c101.886,47.865) MCU.22@100.818,46.797 ; D2-2.2@109.998,54.24 ccw(c109.105,53.347) 109.105,54.61 ccw(c109.105,55.873) D2-2.2@109.998,54.98 ; P2.1.2@127.531,42.331 129.072,42.331 ; P2.1.2@128.067,42.081 cw(c128.566,41.709) 128.566,42.331 cw(c128.566,42.954) P2.1.2@128.067,42.582 ; P2.1.2@128.271,41.929 cw(c129.072,41.331) 129.072,42.331 ; P2.1.2@128.271,42.733 ccw(c129.072,43.331) 129.072,42.331 ; P2.0.2@138.684,51.701 cw(c138.684,50.197) 139.748,51.26 cw(c140.811,52.324) P2.0.2@139.307,52.324 ; P2.0.2@138.684,51.955 cw(c138.684,51.064) 139.314,51.694 cw(c139.944,52.324) P2.0.2@139.053,52.324 ; P2.0.2@138.684,52.324 140.716,50.292 140.716,46.482 139.573,45.339 132.08,45.339 129.072,42.331
  Bottom Layer w0.254: MCU.22@100.076,46.355 132.715,46.355 P2.0.2@138.684,52.324 ; 101.273,46.355 ccw(c101.273,45.458) 100.639,46.092 cw(c101.273,45.458) 101.273,46.355 ; 101.273,46.355 cw(c101.273,47.252) 100.639,46.618 ccw(c101.273,47.252) 101.273,46.355 ; 101.886,46.355 ccw(c101.886,44.845) 100.818,45.913 cw(c101.886,44.845) 101.886,46.355 ; 101.886,46.355 cw(c101.886,47.865) 100.818,46.797 ccw(c101.886,47.865) 101.886,46.355 ; 137.62,51.26 ccw(c136.557,52.324) 138.061,52.324 cw(c136.557,52.324) 137.62,51.26 ; 137.62,51.26 cw(c138.684,50.197) 138.684,51.701 ccw(c138.684,50.197) 137.62,51.26 ; 138.054,51.694 ccw(c137.424,52.324) 138.315,52.324 cw(c137.424,52.324) 138.054,51.694 ; 138.054,51.694 cw(c138.684,51.064) 138.684,51.955 ccw(c138.684,51.064) 138.054,51.694
P2.2: D3-2.2 MCU.23 P2.0.3@138.684,54.864 P2.2.2 | length 100.7
  Top Layer w0.254: MCU.23@100.076,48.895 103.251,48.895 106.553,52.197 106.553,56.388 107.315,57.15 D3-2.2@110.368,57.15 ; MCU.23@100.639,48.632 cw(c101.273,47.998) 101.273,48.895 cw(c101.273,49.792) MCU.23@100.639,49.158 ; MCU.23@100.818,48.453 cw(c101.886,47.385) 101.886,48.895 cw(c101.886,50.405) MCU.23@100.818,49.337 ; D3-2.2@109.998,56.78 ccw(c109.105,55.887) 109.105,57.15 ccw(c109.105,58.413) D3-2.2@109.998,57.52 ; P2.0.3@138.684,54.241 cw(c138.684,52.737) 139.748,53.8 cw(c140.811,54.864) P2.0.3@139.307,54.864 ; P2.0.3@138.684,54.495 cw(c138.684,53.604) 139.314,54.234 cw(c139.944,54.864) P2.0.3@139.053,54.864 ; P2.0.3@138.684,54.864 141.478,52.07 141.478,43.053 140.756,42.331 ; P2.2.2@139.215,42.331 140.756,42.331 ; P2.2.2@139.751,42.081 cw(c140.25,41.709) 140.25,42.331 cw(c140.25,42.954) P2.2.2@139.751,42.582 ; P2.2.2@139.955,41.929 cw(c140.756,41.331) 140.756,42.331 ; P2.2.2@139.955,42.733 ccw(c140.756,43.331) 140.756,42.331
  Bottom Layer w0.254: MCU.23@100.076,48.895 102.997,48.895 109.982,55.88 137.668,55.88 ; P2.0.3@138.684,54.864 137.668,55.88 ; 101.273,48.895 ccw(c101.273,47.998) 100.639,48.632 cw(c101.273,47.998) 101.273,48.895 ; 101.273,48.895 cw(c101.273,49.792) 100.639,49.158 ccw(c101.273,49.792) 101.273,48.895 ; 101.886,48.895 ccw(c101.886,47.385) 100.818,48.453 cw(c101.886,47.385) 101.886,48.895 ; 101.886,48.895 cw(c101.886,50.405) 100.818,49.337 ccw(c101.886,50.405) 101.886,48.895 ; 137.668,55.88 ccw(c138.619,56.831) 138.664,55.487 cw(c138.619,56.831) 137.668,55.88 ; 137.668,55.88 cw(c136.717,54.929) 138.061,54.884 ccw(c136.717,54.929) 137.668,55.88 ; 138.082,55.466 ccw(c138.646,56.029) 138.672,55.233 cw(c138.646,56.029) 138.082,55.466 ; 138.082,55.466 cw(c137.519,54.902) 138.315,54.876 ccw(c137.519,54.902) 138.082,55.466
P2.3: D4-2.2 MCU.24 P2.0.4@138.684,57.404 P2.3.2 | length 114.8
  Top Layer w0.254: MCU.24@100.076,51.435 103.378,51.435 105.918,53.975 105.918,59.055 106.553,59.69 D4-2.2@110.368,59.69 ; MCU.24@100.639,51.172 cw(c101.273,50.538) 101.273,51.435 cw(c101.273,52.332) MCU.24@100.639,51.698 ; MCU.24@100.818,50.993 cw(c101.886,49.925) 101.886,51.435 cw(c101.886,52.945) MCU.24@100.818,51.877 ; D4-2.2@109.998,59.32 ccw(c109.105,58.427) 109.105,59.69 ccw(c109.105,60.953) D4-2.2@109.998,60.06 ; P2.0.4@138.684,56.781 cw(c138.684,54.664) 140.181,56.161 ; P2.0.4@138.684,57.035 cw(c138.684,55.531) 139.748,56.594 ; P2.0.4@138.684,57.404 138.938,57.404 142.113,54.229 142.113,41.529 143.51,40.132 149.208,40.132 P2.3.2@151.407,42.331 ; P2.0.4@139.307,57.404 ccw(c140.198,57.404) 139.568,56.774 ; 149.917,40.841 ccw(c148.426,42.331) P2.3.2@150.534,42.331 ; 150.35,41.274 ccw(c149.294,42.331) P2.3.2@150.788,42.331 ; 150.4,41.324 cw(c151.207,40.516) P2.3.2@151.207,41.658
  Bottom Layer w0.254: MCU.24@100.076,51.435 102.743,51.435 109.601,58.293 120.904,58.293 121.793,57.404 P2.0.4@138.684,57.404 ; 101.273,51.435 ccw(c101.273,50.538) 100.639,51.172 cw(c101.273,50.538) 101.273,51.435 ; 101.273,51.435 cw(c101.273,52.332) 100.639,51.698 ccw(c101.273,52.332) 101.273,51.435 ; 101.886,51.435 ccw(c101.886,49.925) 100.818,50.993 cw(c101.886,49.925) 101.886,51.435 ; 101.886,51.435 cw(c101.886,52.945) 100.818,51.877 ccw(c101.886,52.945) 101.886,51.435 ; 137.18,57.404 ccw(c137.18,58.908) 138.243,57.845 cw(c137.18,58.908) 137.18,57.404 ; 137.18,57.404 cw(c137.18,55.9) 138.243,56.963 ccw(c137.18,55.9) 137.18,57.404 ; 137.793,57.404 ccw(c137.793,58.295) 138.423,57.665 cw(c137.793,58.295) 137.793,57.404 ; 137.793,57.404 cw(c137.793,56.513) 138.423,57.143 ccw(c137.793,56.513) 137.793,57.404
P2.4: D5-2.2 MCU.25 P2.0.5 R20.1 | length 121.3
  Top Layer w0.254: MCU.25@100.076,53.975 103.632,53.975 105.181,55.524 105.181,60.96 106.451,62.23 D5-2.2@110.368,62.23 ; MCU.25@100.639,53.712 cw(c101.273,53.078) 101.273,53.975 cw(c101.273,54.872) MCU.25@100.639,54.238 ; MCU.25@100.818,53.533 cw(c101.886,52.465) 101.886,53.975 cw(c101.886,55.485) MCU.25@100.818,54.417 ; D5-2.2@109.998,61.86 ccw(c109.105,60.967) 109.105,62.23 ccw(c109.105,63.493) D5-2.2@109.998,62.6 ; R20.1@123.582,85.675 cw(c122.689,84.782) 123.952,84.782 cw(c125.215,84.782) R20.1@124.322,85.675 ; R20.1@123.952,86.045 123.952,84.328 125.222,83.058 132.461,83.058 133.223,82.296 133.223,73.406 134.62,72.009 134.62,64.008 P2.0.5@138.684,59.944 ; P2.0.5@138.061,59.944 ccw(c136.557,59.944) 137.62,61.008 ccw(c138.684,62.071) P2.0.5@138.684,60.567 ; P2.0.5@138.315,59.944 ccw(c137.424,59.944) 138.054,60.574 ccw(c138.684,61.204) P2.0.5@138.684,60.313
  Bottom Layer w0.254: MCU.25@100.076,53.975 102.489,53.975 109.474,60.96 137.668,60.96 ; P2.0.5@138.684,59.944 137.668,60.96 ; 101.273,53.975 ccw(c101.273,53.078) 100.639,53.712 cw(c101.273,53.078) 101.273,53.975 ; 101.273,53.975 cw(c101.273,54.872) 100.639,54.238 ccw(c101.273,54.872) 101.273,53.975 ; 101.886,53.975 ccw(c101.886,52.465) 100.818,53.533 cw(c101.886,52.465) 101.886,53.975 ; 101.886,53.975 cw(c101.886,55.485) 100.818,54.417 ccw(c101.886,55.485) 101.886,53.975 ; 137.668,60.96 ccw(c138.619,61.911) 138.664,60.567 cw(c138.619,61.911) 137.668,60.96 ; 137.668,60.96 cw(c136.717,60.009) 138.061,59.964 ccw(c136.717,60.009) 137.668,60.96 ; 138.082,60.546 ccw(c138.646,61.109) 138.672,60.313 cw(c138.646,61.109) 138.082,60.546 ; 138.082,60.546 cw(c137.519,59.982) 138.315,59.956 ccw(c137.519,59.982) 138.082,60.546